# Altium PCB High_Power_Board_v2.PcbDoc (part 1 of 3)
Units mm, origin at the board's own origin, x right, y up, seen from the top; angles counter-clockwise.
Board outline 370 x 200 mm, 2 copper layers (Top Layer, Bottom Layer); 309 components, 248 nets, 1084 pads, 8 vias.
Unrouted connection lines stored in the file: 720.
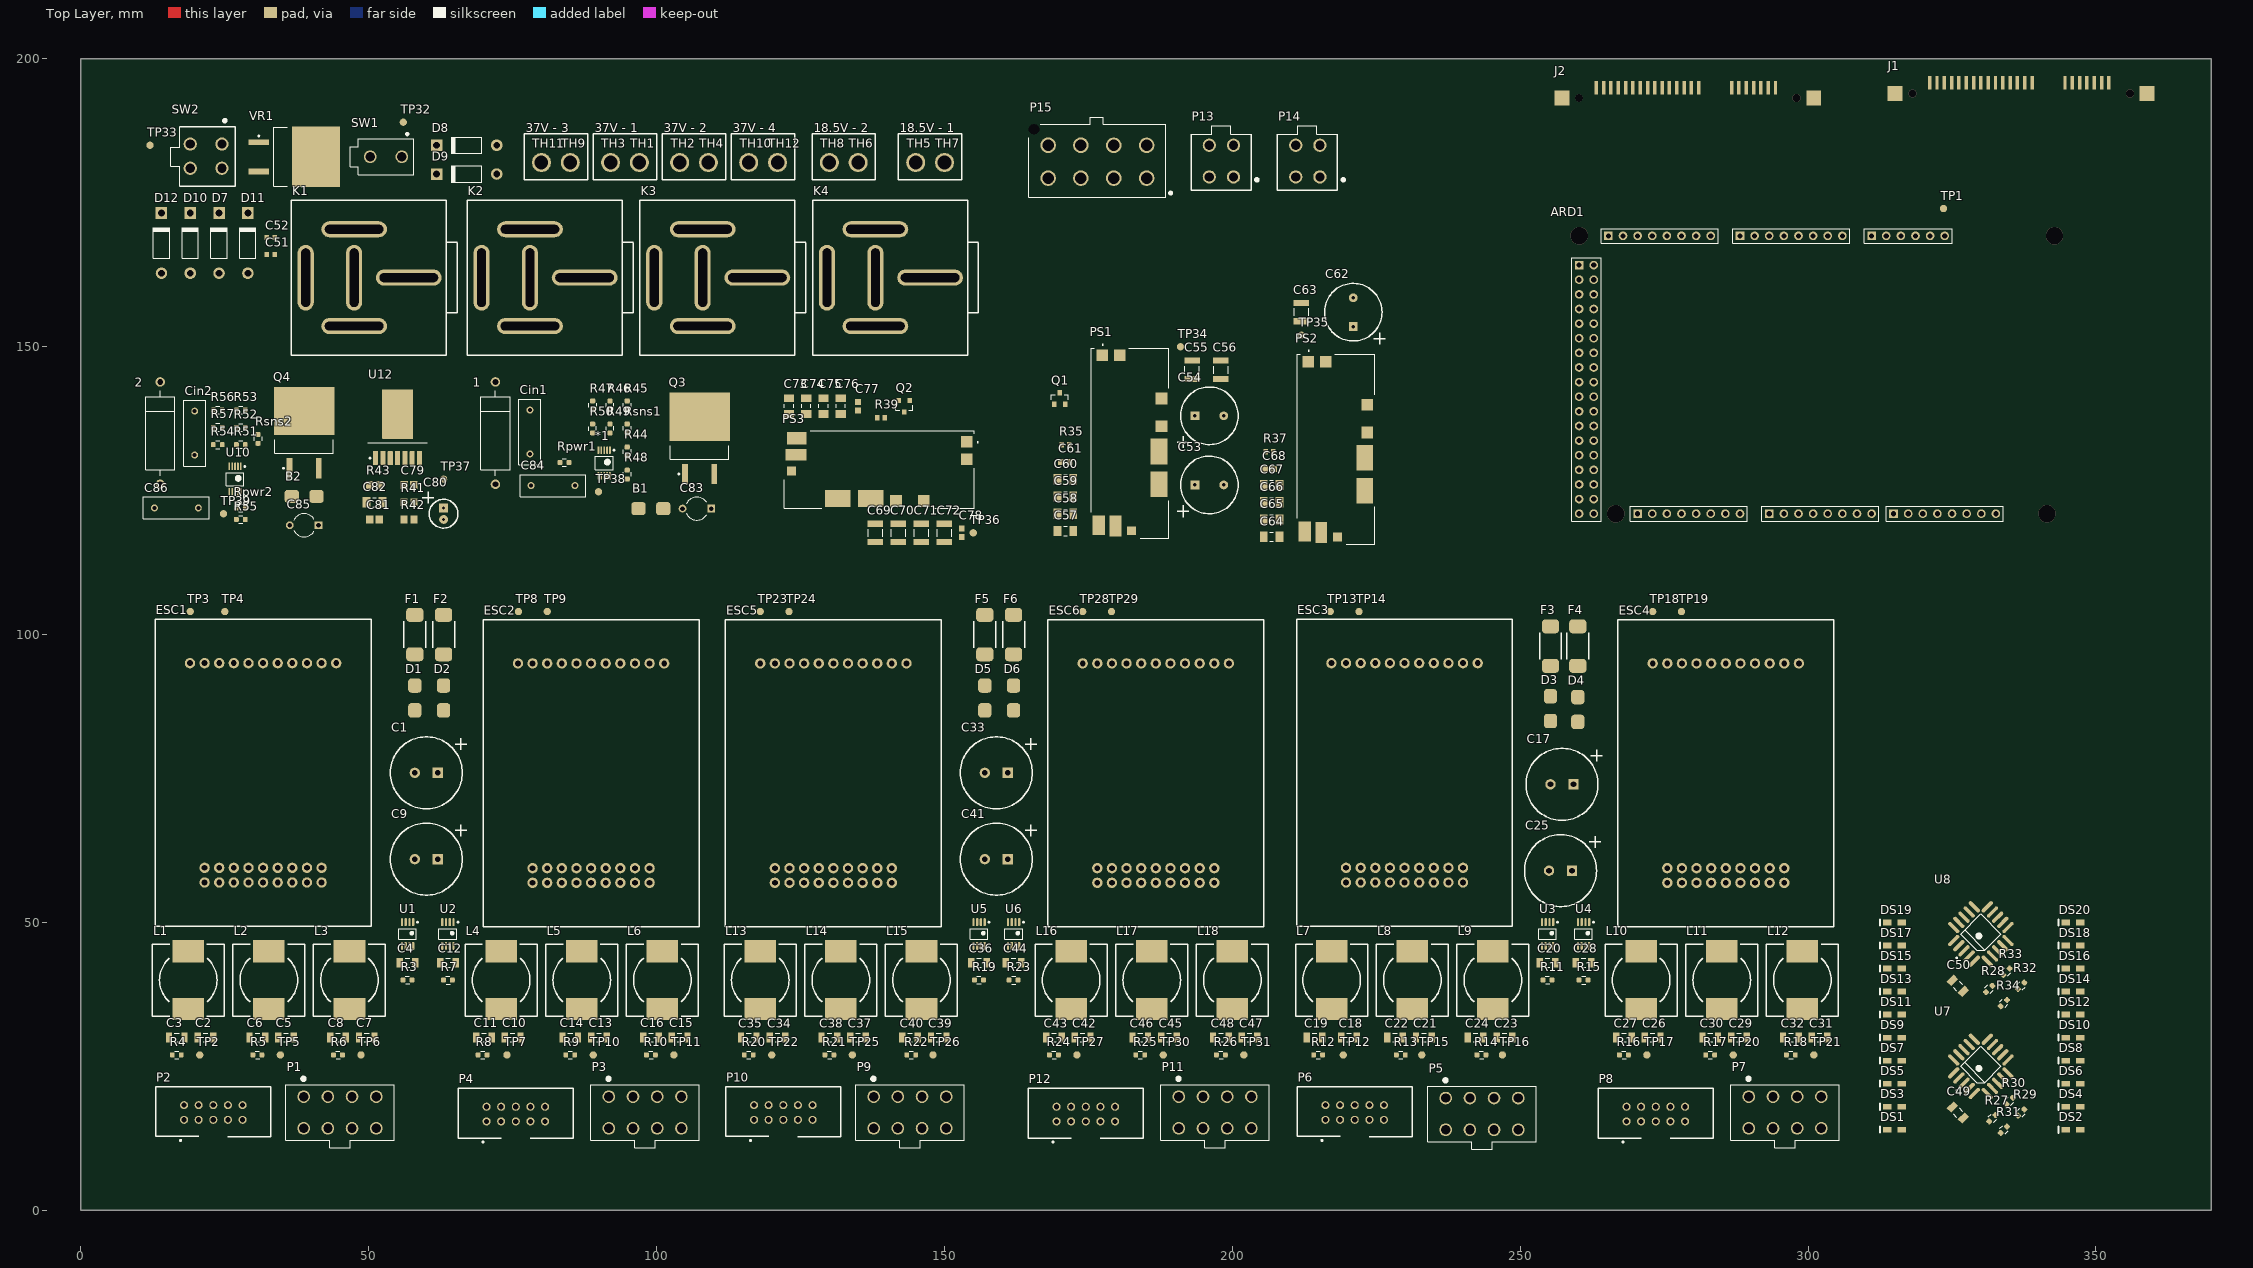
[diagram p0: Top Layer view]
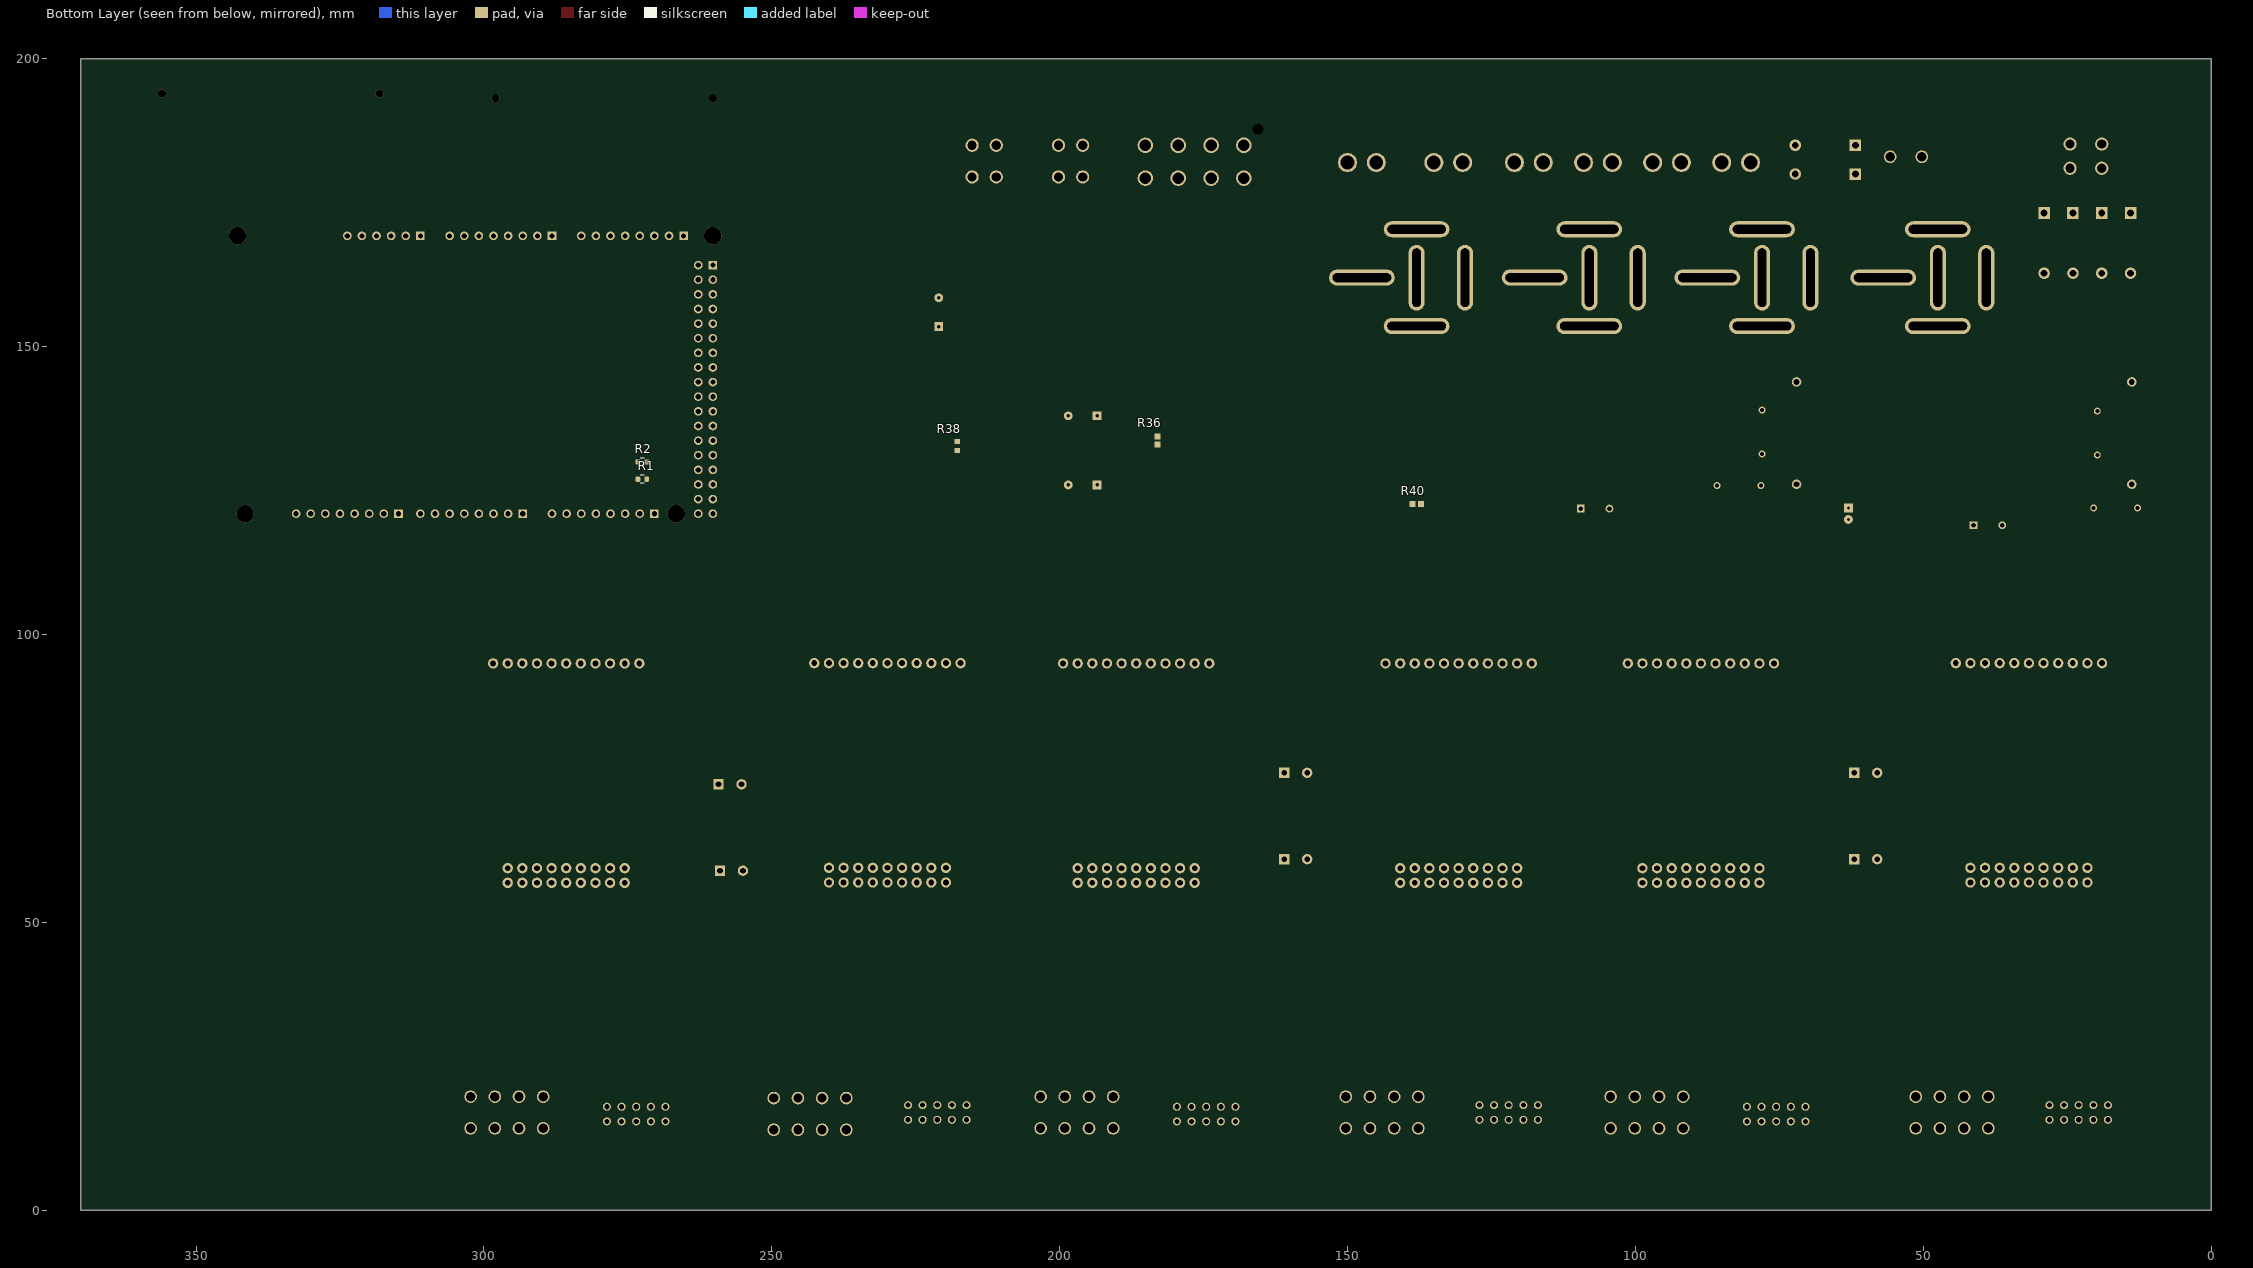
[diagram p1: Bottom Layer view, seen from below]

## Layer stack, top to bottom
Top Solder: solder mask 0.0102, Solder Resist, Dk 3.5
Top Layer: signal copper 0.0356
Dielectric 1: dielectric 0.32, FR-4, Dk 4.8
Bottom Layer: signal copper 0.0356
Bottom Solder: solder mask 0.0102, Solder Resist, Dk 3.5

## Board outline
0,0 0,200 370,200 370,0

## Design rules (kind name [scope] priority, off if disabled: settings)
Clearance [All] p1: gap=0.254 ignorepadtopadclearanceinfootprint=TRUE except(0: Arc-Hole Track-Hole SMDPad-Hole THPad-Hole Via-Hole Fill-Hole Poly-Hole Region-Hole Text-Hole)
PolygonConnect [All] p1: connectstyle=Relief reliefconductorwidth=0.254 reliefentries=4 polygonreliefangle="90 Angle" airgapwidth=0.254
RoomDefinition "SCH-2-Main Controls" [InComponentClass('SCH-2-Main Controls')] p1: confinementstyle=ConfineIn formatcopy=TRUE lockcomponents=FALSE outline 253.785,108.908 367,108.908 367,177.908 253.785,177.908
RoomDefinition "SCH-11-Out Going Connectors" [InComponentClass('SCH-11-Out Going Connectors')] p2: confinementstyle=ConfineIn formatcopy=TRUE lockcomponents=FALSE outline 164,174 370,174 370,200 164,200
RoomDefinition 3V3_board [InComponentClass('3V3_board')] p3: confinementstyle=ConfineIn formatcopy=TRUE lockcomponents=FALSE outline 202,115 202,152 165,152 165,115
RoomDefinition SCH-1-Relay_circuit [InComponentClass('SCH-1-Relay_circuit')] p4: confinementstyle=ConfineIn formatcopy=TRUE lockcomponents=FALSE outline 10,147 158,147 158,190 10,190
RoomDefinition 5V_board [InComponentClass('5V_board')] p5: confinementstyle=ConfineIn formatcopy=TRUE lockcomponents=FALSE outline 202.79,115.1 241.79,115.1 241.79,167 202.79,167
RoomDefinition "SCH-9-Battery Voltage Indicators" [InComponentClass('SCH-9-Battery Voltage Indicators')] p6: confinementstyle=ConfineIn formatcopy=TRUE lockcomponents=FALSE outline 310,10 350,10 350,58 310,58
RoomDefinition 37V_efuse [InComponentClass('37V_efuse')] p7: confinementstyle=ConfineIn formatcopy=TRUE lockcomponents=FALSE outline 9.775,116 45.775,116 45.775,145 9.775,145
RoomDefinition 18V5_efuse [InComponentClass('18V5_efuse')] p8: confinementstyle=ConfineIn formatcopy=TRUE lockcomponents=FALSE outline 68,115.89 115.896,115.89 115.896,145 68,145
RoomDefinition "SCH-10-Power Connectors" [InComponentClass('SCH-10-Power Connectors')] p9: confinementstyle=ConfineIn formatcopy=TRUE lockcomponents=TRUE outline 76,177 156,177 156,189.572 76,189.572
RoomDefinition SCH-6-ESC4 [InComponentClass('SCH-6-ESC4')] p10: confinementstyle=ConfineIn formatcopy=TRUE lockcomponents=FALSE outline 250,10 308,10 308,106 250,106
RoomDefinition SCH-5-ESC3 [InComponentClass('SCH-5-ESC3')] p11: confinementstyle=ConfineIn formatcopy=TRUE lockcomponents=FALSE outline 208,10 266,10 266,106 208,106
RoomDefinition SCH-8-ESC6 [InComponentClass('SCH-8-ESC6')] p12: confinementstyle=ConfineIn formatcopy=TRUE lockcomponents=FALSE outline 152,10 208,10 208,106 152,106
RoomDefinition SCH-7-ESC5 [InComponentClass('SCH-7-ESC5')] p13: confinementstyle=ConfineIn formatcopy=TRUE lockcomponents=FALSE outline 110,10 167,10 167,106 110,106
RoomDefinition SCH-3-ESC1 [InComponentClass('SCH-3-ESC1')] p14: confinementstyle=ConfineIn formatcopy=TRUE lockcomponents=FALSE outline 10,10.04 68,10.04 68,106 10,106 // set top left
RoomDefinition SCH-4-ESC2 [InComponentClass('SCH-4-ESC2')] p15: confinementstyle=ConfineIn formatcopy=TRUE lockcomponents=FALSE outline 53,10 110,10 110,106 53,106 // set top right
RoomDefinition 24V_board [InComponentClass('24V_board')] p16: confinementstyle=ConfineIn formatcopy=TRUE lockcomponents=FALSE outline 48,116 66,116 66,145 48,145
RoomDefinition 12V_board [InComponentClass('12V_board')] p17: confinementstyle=ConfineIn formatcopy=TRUE lockcomponents=FALSE outline 118,114 157,114 157,145 118,145
RoutingVias [All] p1: holewidth=0.711 width=1.27 viastyle="Through Hole" minholewidth=0.711 minwidth=1.27 maxholewidth=0.711 maxwidth=1.27
SolderMaskExpansion [All] p1: expansion=0.102 istentingtop=FALSE
Width [All] p1: maxlimit=0.254 minlimit=0.254 preferedwidth=0.254
30 further rules are at their usual default settings.

## Classes and differential pairs
component class "SCH-11-Out Going Connectors": J1 J2 P13 P14 P15
component class "SCH-10-Power Connectors": TH1 TH2 TH3 TH4 TH5 TH6 TH7 TH8 TH9 TH10 TH11 TH12
component class "SCH-9-Battery Voltage Indicators": C49 C50 DS1 DS2 DS3 DS4 DS5 DS6 DS7 DS8 DS9 DS10 DS11 DS12 DS13 DS14 DS15 DS16 DS17 DS18 DS19 DS20 R27 R28 R29 R30 R31 R32 R33 R34 U7 U8
component class SCH-8-ESC6: C41 C42 C43 C44 C45 C46 C47 C48 D6 ESC6 F6 L16 L17 L18 P11 P12 R23 R24 R25 R26 TP27 TP28 TP29 TP30 TP31 U6
component class SCH-7-ESC5: C33 C34 C35 C36 C37 C38 C39 C40 D5 ESC5 F5 L13 L14 L15 P9 P10 R19 R20 R21 R22 TP22 TP23 TP24 TP25 TP26 U5
component class SCH-6-ESC4: C25 C26 C27 C28 C29 C30 C31 C32 D4 ESC4 F4 L10 L11 L12 P7 P8 R15 R16 R17 R18 TP17 TP18 TP19 TP20 TP21 U4
component class SCH-5-ESC3: C17 C18 C19 C20 C21 C22 C23 C24 D3 ESC3 F3 L7 L8 L9 P5 P6 R11 R12 R13 R14 TP12 TP13 TP14 TP15 TP16 U3
component class SCH-4-ESC2: C9 C10 C11 C12 C13 C14 C15 C16 D2 ESC2 F2 L4 L5 L6 P3 P4 R7 R8 R9 R10 TP7 TP8 TP9 TP10 TP11 U2
component class SCH-3-ESC1: C1 C2 C3 C4 C5 C6 C7 C8 D1 ESC1 F1 L1 L2 L3 P1 P2 R3 R4 R5 R6 TP2 TP3 TP4 TP5 TP6 U1
component class "SCH-2-Main Controls": ARD1 R1 R2 TP1
component class SCH-1-Relay_circuit: C51 C52 D7 D8 D9 D10 D11 D12 K1 K2 K3 K4 SW1 SW2 TP32 TP33 VR1
component class 37V_efuse: 2 B2 C85 C86 Cin2 Q4 R51 R52 R53 R54 R55 R56 R57 Rpwr2 Rsns2 TP39 U10
component class 24V_board: C79 C80 C81 C82 R41 R42 R43 TP37 U12
component class 18V5_efuse: 1 *1 B1 C83 C84 Cin1 Q3 R44 R45 R46 R47 R48 R49 R50 Rpwr1 Rsns1 TP38
component class 12V_board: C69 C70 C71 C72 C73 C74 C75 C76 C77 C78 PS3 Q2 R39 R40 TP36
component class 5V_board: C62 C63 C64 C65 C66 C67 C68 PS2 R37 R38 TP35
component class 3V3_board: C53 C54 C55 C56 C57 C58 C59 C60 C61 PS1 Q1 R35 R36 TP34

## Components (designator, comment, footprint, x,y, rotation, side; value= is the part's Value field where it differs from the comment)
1 "D Zener" DIODE-0.7 72,135 r90 top
2 "D Zener" DIODE-0.7 13.775,135 r90 top
*1 "LM5069MM-2/NOPB" TSSOP50P490X110-10N 90.896,129.809 r270 top (schematic designator U14)
ARD1 "Arduino Mega" "Arduino Mega" 303.41,143.86 r180 top
B1 "TVS_DIODE" SMBJ54A-13-F 99,121.89 r0 top (schematic designator B3)
B2 "TVS_DIODE" SMBJ54A-13-F 38.775,124 r180 top
C1 "Panasonic EEU-FC1J221S" "Panasonic EEU-FC1J221S" 60,76 r0 top value=220uF
C2 "Cap Semi" C1206 21.65,30 r180 top value=100pF
C3 "Cap Semi" C1206 16.65,30 r0 top value=100pF
C4 "Cap Semi" C1206 56.74,43 r0 top value=100pF
C5 "Cap Semi" C1206 35.65,30 r180 top value=100pF
C6 "Cap Semi" C1206 30.65,30 r0 top value=100pF
C7 "Cap Semi" C1206 49.65,30 r180 top value=100pF
C8 "Cap Semi" C1206 44.65,30 r0 top value=100pF
C9 "Panasonic EEU-FC1J221S" "Panasonic EEU-FC1J221S" 60,61 r0 top value=220uF
C10 "Cap Semi" C1206 75,30 r180 top value=100pF
C11 "Cap Semi" C1206 70,30 r0 top value=100pF
C12 "Cap Semi" C1206 63.74,43 r0 top value=100pF
C13 "Cap Semi" C1206 90,30 r180 top value=100pF
C14 "Cap Semi" C1206 85,30 r0 top value=100pF
C15 "Cap Semi" C1206 104,30 r180 top value=100pF
C16 "Cap Semi" C1206 99,30 r0 top value=100pF
C17 "Panasonic EEU-FC1J221S" "Panasonic EEU-FC1J221S" 257.254,74 r0 top value=220uF
C18 "Cap Semi" C1206 220.254,30 r180 top value=100pF
C19 "Cap Semi" C1206 214.254,30 r0 top value=100pF
C20 "Cap Semi" C1206 254.746,43 r0 top value=100pF
C21 "Cap Semi" C1206 233.254,30 r180 top value=100pF
C22 "Cap Semi" C1206 228.254,30 r0 top value=100pF
C23 "Cap Semi" C1206 247.254,30 r180 top value=100pF
C24 "Cap Semi" C1206 242.254,30 r0 top value=100pF
C25 "Panasonic EEU-FC1J221S" "Panasonic EEU-FC1J221S" 257,59 r0 top value=220uF
C26 "Cap Semi" C1206 273,30 r180 top value=100pF
C27 "Cap Semi" C1206 268,30 r0 top value=100pF
C28 "Cap Semi" C1206 261,43 r0 top value=100pF
C29 "Cap Semi" C1206 288,30 r180 top value=100pF
C30 "Cap Semi" C1206 283,30 r0 top value=100pF
C31 "Cap Semi" C1206 302,30 r180 top value=100pF
C32 "Cap Semi" C1206 297,30 r0 top value=100pF
C33 "Panasonic EEU-FC1J221S" "Panasonic EEU-FC1J221S" 159,76 r0 top value=220uF
C34 "Cap Semi" C1206 121,30 r180 top value=100pF
C35 "Cap Semi" C1206 116,30 r0 top value=100pF
C36 "Cap Semi" C1206 156,43 r0 top value=100pF
C37 "Cap Semi" C1206 135,30 r180 top value=100pF
C38 "Cap Semi" C1206 130,30 r0 top value=100pF
C39 "Cap Semi" C1206 149,30 r180 top value=100pF
C40 "Cap Semi" C1206 144,30 r0 top value=100pF
C41 "Panasonic EEU-FC1J221S" "Panasonic EEU-FC1J221S" 159,61 r0 top value=220uF
C42 "Cap Semi" C1206 174,30 r180 top value=100pF
C43 "Cap Semi" C1206 169,30 r0 top value=100pF
C44 "Cap Semi" C1206 162,43 r0 top value=100pF
C45 "Cap Semi" C1206 189,30 r180 top value=100pF
C46 "Cap Semi" C1206 184,30 r0 top value=100pF
C47 "Cap Semi" C1206 203,30 r180 top value=100pF
C48 "Cap Semi" C1206 198,30 r0 top value=100pF
C49 "Cap Semi" C1206 326,17 r315 top value=100pF
C50 "Cap Semi" C1206 326,39 r315 top value=100pF
C51 "Cap" 1608[0603] 33,166 r180 top value=100nF
C52 "Cap" 1608[0603] 33,169 r180 top value=22uF
C53 "330uF" "330uF throught hole" 196,126 r180 top
C54 "330uF" "330uF throught hole" 196,138 r180 top
C55 "22uF" "22uF Capacitor" 193,146 r270 top
C56 "22uF" "22uF Capacitor" 198,146 r270 top
C57 "10uf" "10uF capacitor LPB" 171,118 r0 top
C58 "10uf" "10uF capacitor LPB" 171,121 r0 top
C59 "10uf" "10uF capacitor LPB" 171,124 r0 top
C60 "10uf" "10uF capacitor LPB" 171,127 r0 top
C61 "0.01uF" "0.01uF capacitor" 171,130 r0 top
C62 "330uF" "330uF throught hole" 221,156 r270 top
C63 "22uF" "22uF Capacitor" 212,156 r270 top
C64 "10uf" "10uF capacitor LPB" 206.822,116.986 r0 top
C65 "10uf" "10uF capacitor LPB" 206.822,119.986 r0 top
C66 "10uf" "10uF capacitor LPB" 206.822,122.986 r0 top
C67 "10uf" "10uF capacitor LPB" 206.822,125.986 r0 top
C68 "0.01uF" "0.01uF capacitor" 206.44,128.75 r0 top
C69 "22uF" "22uF Capacitor" 137.996,117.682 r90 top
C70 "22uF" "22uF Capacitor" 141.996,117.682 r90 top
C71 "22uF" "22uF Capacitor" 145.996,117.682 r90 top
C72 "22uF" "22uF Capacitor" 149.996,117.682 r90 top
C73 "10uf" "10uF capacitor LPB" 122.996,139.682 r270 top
C74 "10uf" "10uF capacitor LPB" 125.996,139.682 r270 top
C75 "10uf" "10uF capacitor LPB" 128.996,139.682 r270 top
C76 "10uf" "10uF capacitor LPB" 131.996,139.682 r270 top
C77 "0.01uF" "0.01uF capacitor" 134.996,139.682 r270 top
C78 "0.01uF" "0.01uF capacitor" 152.996,117.682 r90 top
C79 "0.022uF" "0.022uF Ceramic" 57,126 r0 top
C80 "33uF" "33uF Through hole Radical" 63,121 r90 top
C81 "4700 pF" "4700uF 0805" 51,120 r0 top
C82 "10uf" "10uF capacitor LPB" 51,123 r0 top
C83 "Cap2" CAPR5-4X5 107,121.89 r180 top value=100pF (schematic designator C74)
C84 "Cap" RAD-0.3 82,125.89 r0 top value=220nF (schematic designator C76)
C85 "Cap2" CAPR5-4X5 38.775,119 r180 top value=100pF
C86 "Cap" RAD-0.3 16.585,122 r0 top value=220nF
Cin1 "Cin" RAD-0.3 78,135.19 r90 top value=100pF
Cin2 "Cin" RAD-0.3 19.775,135 r90 top value=100pF
D1 "TVS_DIODE" SMBJ54A-13-F 58,89 r270 top
D2 "TVS_DIODE" SMBJ54A-13-F 63,89 r270 top
D3 "TVS_DIODE" SMBJ54A-13-F 255.254,87.15 r270 top
D4 "TVS_DIODE" SMBJ54A-13-F 260,87 r270 top
D5 "TVS_DIODE" SMBJ54A-13-F 157,89 r270 top
D6 "TVS_DIODE" SMBJ54A-13-F 162,89 r270 top
D7 "Diode 1N4001" DO-41 24,168 r90 top
D8 "Diode 1N4001" DO-41 67,185 r180 top
D9 "Diode 1N4001" DO-41 67,180 r180 top
D10 "Diode 1N4001" DO-41 19,168 r90 top
D11 "Diode 1N4001" DO-41 29,168 r90 top
D12 "Diode 1N4001" DO-41 14,168 r90 top
DS1 "LTST-S220KGKT" LTST-S220KGKT_V 315,14.011 r180 top
DS2 "LTST-S220KGKT" LTST-S220KGKT_V 346,14 r180 top
DS3 "LTST-S220KGKT" LTST-S220KGKT_V 315,18 r180 top
DS4 "LTST-S220KGKT" LTST-S220KGKT_V 346,18 r180 top
DS5 "LTST-S220KGKT" LTST-S220KGKT_V 315,22 r180 top
DS6 "LTST-S220KGKT" LTST-S220KGKT_V 346,22 r180 top
DS7 "LTST-S220KGKT" LTST-S220KGKT_V 315,26 r180 top
DS8 "LTST-S220KGKT" LTST-S220KGKT_V 346,26 r180 top
DS9 "LTST-S220KGKT" LTST-S220KGKT_V 315,30 r180 top
DS10 "LTST-S220KGKT" LTST-S220KGKT_V 346,30 r180 top
DS11 "LTST-S220KGKT" LTST-S220KGKT_V 315,34 r180 top
DS12 "LTST-S220KGKT" LTST-S220KGKT_V 346,34 r180 top
DS13 "LTST-S220KGKT" LTST-S220KGKT_V 315,38 r180 top
DS14 "LTST-S220KGKT" LTST-S220KGKT_V 346,38 r180 top
DS15 "LTST-S220KGKT" LTST-S220KGKT_V 315,42 r180 top
DS16 "LTST-S220KGKT" LTST-S220KGKT_V 346,42 r180 top
DS17 "LTST-S220KGKT" LTST-S220KGKT_V 315,46 r180 top
DS18 "LTST-S220KGKT" LTST-S220KGKT_V 346,46 r180 top
DS19 "LTST-S220KGKT" LTST-S220KGKT_V 315,50 r180 top
DS20 "LTST-S220KGKT" LTST-S220KGKT_V 346,50 r180 top
ESC1 "ESCON 50/8 HE" "ESCON 50/8 HE" 31.65,76 r90 top
ESC2 "ESCON 50/8 HE" "ESCON 50/8 HE" 88.62,75.95 r90 top
ESC3 "ESCON 50/8 HE" "ESCON 50/8 HE" 229.904,76 r90 top
ESC4 "ESCON 50/8 HE" "ESCON 50/8 HE" 285.7,75.95 r90 top
ESC5 "ESCON 50/8 HE" "ESCON 50/8 HE" 130.7,75.95 r90 top
ESC6 "ESCON 50/8 HE" "ESCON 50/8 HE" 186.7,75.95 r90 top
F1 "Fuse 2" 0157010.DR 58,100 r90 top
F2 "Fuse 2" 0157010.DR 63,100 r90 top
F3 "Fuse 2" 0157010.DR 255.254,98 r90 top
F4 "Fuse 2" 0157010.DR 260,98 r90 top
F5 "Fuse 2" 0157010.DR 157,100 r90 top
F6 "Fuse 2" 0157010.DR 162,100 r270 top
J1 "SATA 1" "SATA Female" 337,194 r0 top
J2 "SATA 2" "SATA Female" 279.1,193.175 r0 top
K1 "Relay" "Relay RC-700112-NN" 50,162 r90 top
K2 "Relay" "Relay RC-700112-NN" 80.54,162 r90 top
K3 "Relay" "Relay RC-700112-NN" 110.54,162 r90 top
K4 "Relay" "Relay RC-700112-NN" 140.54,162 r90 top
L1 "DR127-4R7-R" DR127-4R7-R 18.65,40 r270 top value=4.7uH
L2 "DR127-4R7-R" DR127-4R7-R 32.65,40 r270 top value=4.7uH
L3 "DR127-4R7-R" DR127-4R7-R 46.65,40 r270 top value=4.7uH
L4 "DR127-4R7-R" DR127-4R7-R 73,40 r270 top value=4.7uH
L5 "DR127-4R7-R" DR127-4R7-R 87,40 r270 top value=4.7uH
L6 "DR127-4R7-R" DR127-4R7-R 101,40 r270 top value=4.7uH
L7 "DR127-4R7-R" DR127-4R7-R 217.254,40 r270 top value=4.7uH
L8 "DR127-4R7-R" DR127-4R7-R 231.254,40 r270 top value=4.7uH
L9 "DR127-4R7-R" DR127-4R7-R 245.254,40 r90 top value=4.7uH
L10 "DR127-4R7-R" DR127-4R7-R 271,40 r270 top value=4.7uH
L11 "DR127-4R7-R" DR127-4R7-R 285,40 r270 top value=4.7uH
L12 "DR127-4R7-R" DR127-4R7-R 299,40 r90 top value=4.7uH
L13 "DR127-4R7-R" DR127-4R7-R 118,40 r270 top value=4.7uH
L14 "DR127-4R7-R" DR127-4R7-R 132,40 r270 top value=4.7uH
L15 "DR127-4R7-R" DR127-4R7-R 146,40 r270 top value=4.7uH
L16 "DR127-4R7-R" DR127-4R7-R 172,40 r270 top value=4.7uH
L17 "DR127-4R7-R" DR127-4R7-R 186,40 r270 top value=4.7uH
L18 "DR127-4R7-R" DR127-4R7-R 200,40 r270 top value=4.7uH
P1 "0039281083" "Molex Mini-Fit Jr 0039281083" 45,17 r0 top
P2 "Header_10_Pos_Ribbon Male" 3M_2510-6002UB 23,17 r0 top
P3 "0039281083" "Molex Mini-Fit Jr 0039281083" 98,17 r0 top
P4 "Header_10_Pos_Ribbon Male" 3M_2510-6002UB 75.54,16.73 r0 top
P5 "0039281083" "Molex Mini-Fit Jr 0039281083" 243.354,16.75 r0 top
P6 "Header_10_Pos_Ribbon Male" 3M_2510-6002UB 221.254,17 r0 top
P7 "0039281083" "Molex Mini-Fit Jr 0039281083" 296,17 r0 top
P8 "Header_10_Pos_Ribbon Male" 3M_2510-6002UB 273.54,16.73 r0 top
P9 "0039281083" "Molex Mini-Fit Jr 0039281083" 144,17 r0 top
P10 "Header_10_Pos_Ribbon Male" 3M_2510-6002UB 122,17 r0 top
P11 "0039281083" "Molex Mini-Fit Jr 0039281083" 197,17 r0 top
P12 "Header_10_Pos_Ribbon Male" 3M_2510-6002UB 174.54,16.73 r0 top
P13 "Mini-Fit Jr 4 Pos" "MOLEX 0039281043" 200.2,179.5 r180 top
P14 "Mini-Fit Jr 4 Pos" "MOLEX 0039281043" 215.2,179.5 r180 top
P15 "Mini-Fit Jr 8 Pos RA" "MOLEX 172065-0208" 175.31,183.536 r0 top
PS1 "APXW012A0X3-SRZ" APXW012A0X3SRZ 182.227,133.62 r270 top (schematic designator U9)
PS2 "APXW012A0X3-SRZ" APXW012A0X3SRZ 217.98,132.53 r270 top (schematic designator U10)
PS3 "APXW012A0X3-SRZ" APXW012A0X3SRZ 138.996,128.682 r180 top
Q1 "2N7002-7-F" FP-SOT23-MFG 170,141 r90 top
Q2 "2N7002-7-F" FP-SOT23-MFG 142.996,139.682 r270 top
Q3 "PSMN4R8-100BSEJ" DPAK254P1420X457-3N 107.46,133.99 r90 top (schematic designator Q6)
Q4 "PSMN4R8-100BSEJ" DPAK254P1420X457-3N 38.775,135 r90 top
R1 "Res1" RESC1608X06N_0603 272.49,127 r0 bottom value=10k
R2 "Res1" RESC1608X06N_0603 272.49,130 r0 bottom value=10k
R3 "Res1" RESC1608X06N_0603 56.74,40 r0 top value=1K
R4 "Res1" RESC1608X06N_0603 16.65,27 r180 top value=1K
R5 "Res1" RESC1608X06N_0603 30.65,27 r180 top value=1K
R6 "Res1" RESC1608X06N_0603 44.65,27 r180 top value=1K
R7 "Res1" RESC1608X06N_0603 63.74,40 r180 top value=1K
R8 "Res1" RESC1608X06N_0603 69.775,27 r180 top value=1K
R9 "Res1" RESC1608X06N_0603 85,27 r180 top value=1K
R10 "Res1" RESC1608X06N_0603 99,27 r180 top value=1K
R11 "Res1" RESC1608X06N_0603 254.746,40 r0 top value=1K
R12 "Res1" RESC1608X06N_0603 214.904,27 r180 top value=1K
R13 "Res1" RESC1608X06N_0603 229.254,27 r180 top value=1K
R14 "Res1" RESC1608X06N_0603 243.254,27 r180 top value=1K
R15 "Res1" RESC1608X06N_0603 261,40 r180 top value=1K
R16 "Res1" RESC1608X06N_0603 268,27 r180 top value=1K
R17 "Res1" RESC1608X06N_0603 283,27 r180 top value=1K
R18 "Res1" RESC1608X06N_0603 297,27 r180 top value=1K
R19 "Res1" RESC1608X06N_0603 156,40 r0 top value=1K
R20 "Res1" RESC1608X06N_0603 116,27 r180 top value=1K
R21 "Res1" RESC1608X06N_0603 130,27 r180 top value=1K
R22 "Res1" RESC1608X06N_0603 144.225,27 r180 top value=1K
R23 "Res1" RESC1608X06N_0603 162,40 r180 top value=1K
R24 "Res1" RESC1608X06N_0603 169,27 r180 top value=1K
R25 "Res1" RESC1608X06N_0603 184,27 r180 top value=1K
R26 "Res1" RESC1608X06N_0603 198,27 r180 top value=1K
R27 "Res1" RESC1608X06N_0603 332,16 r225 top value=1K
R28 "Res1" RESC1608X06N_0603 331.452,38.452 r45 top value=1K
R29 "Res1" RESC1608X06N_0603 337,17 r45 top value=1K
R30 "Res1" RESC1608X06N_0603 335,19 r45 top value=1K
R31 "Res1" RESC1608X06N_0603 334,14 r225 top value=1K
R32 "Res1" RESC1608X06N_0603 337,39 r45 top value=1K
R33 "Res1" RESC1608X06N_0603 334.452,41.452 r45 top value=1K
R34 "Res1" RESC1608X06N_0603 334,36 r45 top value=1K
R35 "CRCW06030000Z0EA" RESC1609X50X30NL8T20 171,133 r0 top
R36 "26.7KR" "26.7KR Resistor" 183,133.725 r90 bottom (schematic designator R35)
R37 "CRCW06030000Z0EA" RESC1609X50X30NL8T20 206.44,131.75 r0 top
R38 "16.2 KOhm" "16.2 KOhm Resistor" 217.79,132.75 r90 bottom (schematic designator R36)
R39 "CRCW06030000Z0EA" RESC1609X50X30NL8T20 138.996,137.682 r180 top
R40 "6.19 KOhm" "6.19KOhm Resistor" 137.996,122.682 r0 bottom
R41 "34KOhm" "34 KOhm Resistor ERA-6A" 57,123 r0 top
R42 "1.18 KOhm" "34 KOhm Resistor ERA-6A" 57,120 r180 top
R43 "499 KOhm" "499KOhm RG2012" 51,126 r0 top
R44 "RCL2" RESC1608X06N_0603 94.896,131.809 r90 top value=1K (schematic designator R48)
R45 "RCL1" RESC1608X06N_0603 94.896,139.809 r270 top value=1K (schematic designator R49)
R46 "R1" RESC1608X06N_0603 91.896,139.809 r270 top value=1K (schematic designator R50)
R47 "R3" RESC1608X06N_0603 88.896,139.809 r270 top value=1K (schematic designator R51)
R48 "R" RESC1608X06N_0603 94.896,127.809 r270 top value=1K (schematic designator R53)
R49 "R2" RESC1608X06N_0603 91.896,135.809 r90 top value=1K (schematic designator R54)
R50 "R4" RESC1608X06N_0603 88.896,135.809 r90 top value=1K (schematic designator R55)
R51 "RCL2" RESC1608X06N_0603 27.775,133 r0 top value=1K
R52 "RCL1" RESC1608X06N_0603 27.775,136 r180 top value=1K
R53 "R1" RESC1608X06N_0603 27.775,139 r0 top value=1K
R54 "R3" RESC1608X06N_0603 23.775,133 r180 top value=1K
R55 "R" RESC1608X06N_0603 27.775,120 r0 top value=1K
R56 "R2" RESC1608X06N_0603 23.775,139 r0 top value=1K
R57 "R4" RESC1608X06N_0603 23.775,136 r0 top value=1K
Rpwr1 "Rpwr" RESC1608X06N_0603 84,129.89 r0 top value=1K (schematic designator R56)
Rpwr2 "Rpwr" RESC1608X06N_0603 27.775,122 r0 top value=1K
Rsns1 "Rsns" RESC1608X06N_0603 94.896,135.809 r270 top value=1K (schematic designator R47)
Rsns2 "Rsns" RESC1608X06N_0603 30.775,134 r270 top value=1K
SW1 "Key_Switch" MOLEX_0039293026 53,183 r180 top
SW2 "NO-NC ESD with light" "MOLEX 0039281043" 24.5,185.2 r270 top
TH1 "12AWG_TH" 12AWG_Wire_TH 97,182 r270 top
TH2 "12AWG_TH" 12AWG_Wire_TH 104,182 r90 top
TH3 "12AWG_TH" 12AWG_Wire_TH 92,182 r270 top
TH4 "12AWG_TH" 12AWG_Wire_TH 109,182 r90 top
TH5 "12AWG_TH" 12AWG_Wire_TH 145,182 r0 top
TH6 "12AWG_TH" 12AWG_Wire_TH 135,182 r0 top
TH7 "12AWG_TH" 12AWG_Wire_TH 150,182 r0 top
TH8 "12AWG_TH" 12AWG_Wire_TH 130,182 r0 top
TH9 "12AWG_TH" 12AWG_Wire_TH 85,182 r270 top
TH10 "12AWG_TH" 12AWG_Wire_TH 116,182 r90 top
TH11 "12AWG_TH" 12AWG_Wire_TH 80,182 r270 top
TH12 "12AWG_TH" 12AWG_Wire_TH 121,182 r90 top
TP1 "TestPt" 50_MIL_PAD 323.51,174 r90 top
TP2 "TestPt" 50_MIL_PAD 20.65,27 r90 top
TP3 "TestPt" 50_MIL_PAD 19,104 r270 top
TP4 "TestPt" 50_MIL_PAD 25,104 r270 top
TP5 "TestPt" 50_MIL_PAD 34.65,27 r90 top
TP6 "TestPt" 50_MIL_PAD 48.65,27 r90 top
TP7 "TestPt" 50_MIL_PAD 74,27 r90 top
TP8 "TestPt" 50_MIL_PAD 76,104 r270 top
TP9 "TestPt" 50_MIL_PAD 81,104 r270 top
TP10 "TestPt" 50_MIL_PAD 89,27 r90 top
TP11 "TestPt" 50_MIL_PAD 103,27 r90 top
TP12 "TestPt" 50_MIL_PAD 219.254,27 r90 top
TP13 "TestPt" 50_MIL_PAD 217,104 r270 top
TP14 "TestPt" 50_MIL_PAD 222,104 r270 top
TP15 "TestPt" 50_MIL_PAD 232.904,27 r90 top
TP16 "TestPt" 50_MIL_PAD 246.904,27 r90 top
TP17 "TestPt" 50_MIL_PAD 272,27 r90 top
TP18 "TestPt" 50_MIL_PAD 273,104 r90 top
TP19 "TestPt" 50_MIL_PAD 278,104 r90 top
TP20 "TestPt" 50_MIL_PAD 287,27 r90 top
TP21 "TestPt" 50_MIL_PAD 301,27 r90 top
TP22 "TestPt" 50_MIL_PAD 120,27 r90 top
TP23 "TestPt" 50_MIL_PAD 118,104 r270 top
TP24 "TestPt" 50_MIL_PAD 123,104 r270 top
TP25 "TestPt" 50_MIL_PAD 134,27 r90 top
TP26 "TestPt" 50_MIL_PAD 148,27 r90 top
TP27 "TestPt" 50_MIL_PAD 173,27 r90 top
TP28 "TestPt" 50_MIL_PAD 174,104 r90 top
TP29 "TestPt" 50_MIL_PAD 179,104 r90 top
TP30 "TestPt" 50_MIL_PAD 188,27 r90 top
TP31 "TestPt" 50_MIL_PAD 202,27 r90 top
TP32 "TestPt" 50_MIL_PAD 56,189 r90 top
TP33 "TestPt" 50_MIL_PAD 12,185 r90 top
TP34 "TestPt" 50_MIL_PAD 191,150 r180 top
TP35 "TestPt" 50_MIL_PAD 212,152 r180 top
TP36 "TestPt" 50_MIL_PAD 154.996,117.682 r90 top
TP37 "TestPt" 50_MIL_PAD 63,127 r90 top
TP38 "TestPt" 50_MIL_PAD 89.896,124.809 r0 top (schematic designator TP37)
TP39 "TestPt" 50_MIL_PAD 24.775,121 r90 top
U1 "DAC121C085" MUA08A_L 56.74,48 r270 top
U2 "DAC121C085" MUA08A_L 63.74,48 r270 top
U3 "DAC121C085" MUA08A_L 254.746,48 r270 top
U4 "DAC121C085" MUA08A_L 261,48 r270 top
U5 "DAC121C085" MUA08A_L 156,48 r270 top
U6 "DAC121C085" MUA08A_L 162,48 r270 top
U7 "LM3914VX/NOPB" PLCC127P990X990X457-20N 330,25 r135 top
U8 "LM3914VX/NOPB" PLCC127P990X990X457-20N 330,48 r135 top
U10 "LM5069MM-2/NOPB" TSSOP50P490X110-10N 26.775,127 r270 top (schematic designator U12)
U12 "LMZ14203HTZX/NOPB" NDW0007A_V 55,136 r90 top
VR1 "Volt Reg" DPAK254P1420X457-3N 37,183 r0 top

## Footprints (in the part's own frame and the unit in brackets; to place one, negate y for a bottom-side part, rotate by r counter-clockwise, add the part's x,y. Pads: shape width x height; smd on the part's side, far side on the other; paste and mask are expansions set on the pad)
"0.01uF capacitor" [mm] "Chip Capacitor, 2-Leads, Body 1,60x0,80mm, IPC Medium Density"
  rect 1.05x1 smd: 1(-0.75,0) 2(0.75,0)
  body extent -0.88,-0.48 0.87,0.47, height 0.87
"0.022uF Ceramic" [mm] "Chip Capacitor, 2-Leads, Body 2,00x1,25mm, IPC Medium Density"
  rect 1.3x1.45 smd: 1(-0.8,0) 2(0.8,0)
  body extent -1.1,-0.72 1.1,0.72, height 0.88
3M_2510-6002UB [mm] "Connector Header Through Hole 10 position 0.100\" (2.54mm)"
  round 1.4 hole 0.889: 1(-5.08,-1.27) 2(-5.08,1.27) 3(-2.54,-1.27) 4(-2.54,1.27) 5(0,-1.27) 6(0,1.27) 7(2.54,-1.27) 8(2.54,1.27) 9(5.08,-1.27) 10(5.08,1.27)
  silkscreen extent -10.01,-4.89 9.98,4.47, body extent -10.01,-4.17 10.01,4.47, height 9.4
"6.19KOhm Resistor" [mm] "Chip Resistor, 2-Leads, Body 1,60x0,80mm, IPC Medium Density"
  rect 1.05x1 smd: 1(-0.725,0) 2(0.725,0)
  body extent -0.9,-0.5 0.9,0.5, height 0.55
"10uF capacitor LPB" [mm] "Chip Capacitor, 2-Leads, Body 3,20x1,60mm, IPC Medium Density"
  rect 1.35x1.8 smd: 1(-1.375,0) 2(1.375,0)
  silkscreen extent -0.3,-0.8 0.3,0.8, body extent -1.7,-0.9 1.7,0.9, height 1.8
12AWG_Wire_TH [mm] "21.25mm Dia: 28mm Pad"
  round 3.3 hole 2.35 mask+0.2: 1(0,0)
"16.2 KOhm Resistor" [mm] "Chip Resistor, 2-Leads, Body 1,60x0,80mm, IPC Medium Density"
  rect 0.85x0.9 smd: 1(-0.775,0) 2(0.775,0)
  body extent -0.85,-0.45 0.85,0.45, height 0.55
"22uF Capacitor" [mm] "Chip Capacitor, 2-Leads, Body 3,20x2,50mm, IPC Medium Density"
  rect 1.05x2.7 smd: 1(-1.575,0) 2(1.575,0)
  silkscreen extent -0.65,-1.25 0.65,1.25, body extent -1.75,-1.35 1.75,1.35, height 2.7
"26.7KR Resistor" [mm] "Chip Resistor, 2-Leads, Body 1,60x0,80mm, IPC Medium Density"
  rect 1.05x1 smd: 1(-0.725,0) 2(0.725,0)
  body extent -0.9,-0.5 0.9,0.5, height 0.55
"33uF Through hole Radical" [mm]
  rect 1.524x1.524 hole 0.5: 1(1,0)
  round 1.524 hole 0.5: 2(-1,0)
  silkscreen extent -2.5,-2.5 3.79,3.67
"34 KOhm Resistor ERA-6A" [mm] "Chip Resistor, 2-Leads, Body 2,00x1,25mm, IPC Medium Density"
  rect 1.2x1.35 smd: 1(-0.85,0) 2(0.85,0)
  body extent -1.1,-0.67 1.1,0.67, height 0.6
50_MIL_PAD [mm]
  round 1.27 smd: 1(0,0)
"330uF throught hole" [mm]
  rect 1.524x1.524 hole 0.6: 1(2.5,0)
  round 1.524 hole 0.6: 2(-2.5,0)
  silkscreen extent -5,-5 5.57,5.57
"499KOhm RG2012" [mm] "Chip Resistor, 2-Leads, Body 2,00x1,25mm, IPC Medium Density"
  rect 1.15x1.45 smd: 1(-0.875,0) 2(0.875,0)
  body extent -1.1,-0.72 1.1,0.72, height 0.5
1608[0603] [mm] "Chip Capacitor, Body 1.6x0.8mm, IPC High Density"
  rect 0.8x0.9 smd: 1(-0.7,0) 2(0.7,0)
  body extent -0.87,-0.48 0.87,0.48, height 1.3
"4700uF 0805" [mm] "Chip Capacitor, 2-Leads, Body 2,00x1,25mm, IPC Medium Density"
  rect 1.3x1.45 smd: 1(-0.8,0) 2(0.8,0)
  body extent -1.1,-0.72 1.1,0.72, height 0.88
0157010.DR [mm]
  rrect50% 2.4x3 smd: 1(3.43,0) 2(-3.43,0)
  silkscreen extent -2.29,-1.91 2.29,1.91, body extent -3.29,-1.84 3.29,1.84, height 3.9
APXW012A0X3SRZ [mm]
  rect 2.03x2.03 smd: 1(-14.89,-4.82) 7(-2.57,5.46) 8(-7.4,5.46) 9(-14.89,-1.78)
  rect 3.43x2.16 smd: 2(14.64,-5.4)
  rect 3.68x2.03 smd: 3(14.78,-2.54)
  rect 1.52x1.52 smd: 4(15.59,0.26)
  rect 4.45x2.92 smd: 5(7.53,5.02) 6(1.81,5.02)
  silkscreen extent -16.86,-6.73 16.86,6.73, body extent -16.16,-6.73 16.86,6.73, height 10.1
"Arduino Mega" [mm] "Arduino Mega 2560"
  rect 1.5x1.5 hole 0.9: 0(10.16,22.86) 8(-11.43,22.86) 21(33.02,22.86) 59(-7.62,-25.4) 67(15.24,-25.4) 75(38.1,-25.4) 79(43.18,-20.32)
  round 1.5 hole 0.9: 1(7.62,22.86) 2(5.08,22.86) 3(2.54,22.86) 4(0,22.86) 5(-2.54,22.86) 6(-5.08,22.86) 7(-7.62,22.86) 9(-13.97,22.86) 10(-16.51,22.86) 11(-19.05,22.86) 12(-21.59,22.86) 13(-24.13,22.86) 14(15.24,22.86) 15(17.78,22.86) 16(20.32,22.86) 17(22.86,22.86) 18(25.4,22.86) 19(27.94,22.86) 20(30.48,22.86) 22(40.64,20.32) 23(43.18,20.32) 24(40.64,17.78) 25(43.18,17.78) 26(40.64,15.24) 27(43.18,15.24) 28(40.64,12.7) 29(43.18,12.7) 30(40.64,10.16) 31(43.18,10.16) 32(40.64,7.62) 33(43.18,7.62) 34(40.64,5.08) 35(43.18,5.08) 36(40.64,2.54) 37(43.18,2.54) 38(40.64,0) 39(43.18,0) 40(40.64,-2.54) 41(43.18,-2.54) 42(40.64,-5.08) 43(43.18,-5.08) 44(40.64,-7.62) 45(43.18,-7.62) 46(40.64,-10.16) 47(43.18,-10.16) 48(40.64,-12.7) 49(43.18,-12.7) 50(40.64,-15.24) 51(43.18,-15.24) 52(40.64,-17.78) 53(43.18,-17.78) 54(-20.32,-25.4) 55(-17.78,-25.4) 56(-15.24,-25.4) 57(-12.7,-25.4) 58(-10.16,-25.4) 60(-2.54,-25.4) 61(0,-25.4) 62(2.54,-25.4) 63(5.08,-25.4) 64(7.62,-25.4) 65(10.16,-25.4) 66(12.7,-25.4) 68(20.32,-25.4) 69(22.86,-25.4) 70(25.4,-25.4) 71(27.94,-25.4) 72(30.48,-25.4) 73(33.02,-25.4) 74(35.56,-25.4) 76(-26.67,22.86) 77(-29.21,22.86) 78(40.64,-20.32) 80(43.18,22.86) 81(40.64,22.86)
  silkscreen extent -30.48,-26.67 44.45,24.13
C1206 [mm] "Chip Capacitor, Body 3.2x1.6mm, IPC High Density"
  rect 1.1x1.7 smd: 1(-1.35,0) 2(1.35,0)
  silkscreen extent -0.4,-0.75 0.4,0.75, body extent -1.7,-0.9 1.7,0.9, height 1.3
CAPR5-4X5 [mm] "Capacitor; 2 Leads"
  rect 1.35x1.35 hole 0.8: 1(-2.5,0)
  round 1.35 hole 0.8: 2(2.5,0)
  silkscreen extent -1.69,-2 1.82,2
DIODE-0.7 [mm] "Diode, Thru-Hole; 2 Leads; 0.7 in Pin Spacing"
  round 1.65 hole 1: 1(-8.89,0) 2(8.89,0)
  silkscreen extent -7.37,-2.54 7.37,2.54
DO-41 [mm] "Diode, Axial; Body 5.2 x 2.7 mm (LxDia. max), Lead Dia. 0.86 mm (max)"
  round 2 hole 1.2: 1(-5.23,0)
  rect 2x2 hole 1.2: 2(5.23,0)
  silkscreen extent -2.65,-1.4 2.75,1.4
DPAK254P1420X457-3N [mm] "D2-PAK, 3-Pads, Body 7.77x8.48mm (max), IPC Medium Density"
  rect 3.504x1 smd: 1(-6.1,2.54) 3(-6.1,-2.54)
  rect 8.38x10.49 smd: 2(3.85,0)
  silkscreen extent -6.22,-5.1 -1.14,5.1, body extent -6.71,-5.13 7.48,5.13, height 4.83
DR127-4R7-R [mm] "Fixed Inductors 4.7uH 16.5A 0.0092ohms"
  rect 3.85x5.5 smd: 1(-5,0) 2(5,0)
  silkscreen extent -6.25,-6.25 6.25,6.25
"ESCON 50/8 HE" [mm]
  round 1.8 hole 1: 1(-19.05,10.16) 2(-16.51,10.16) 3(-19.05,7.62) 4(-16.51,7.62) 5(-19.05,5.08) 6(-16.51,5.08) 7(-19.05,2.54) 8(-16.51,2.54) 9(-19.05,0) 10(-16.51,0) 11(-19.05,-2.54) 12(-16.51,-2.54) 13(-19.05,-5.08) 14(-16.51,-5.08) 15(-19.05,-7.62) 16(-16.51,-7.62) 17(-19.05,-10.16) 18(-16.51,-10.16) 19(19.05,-12.7) 20(19.05,-10.16) 21(19.05,-7.62) 22(19.05,-5.08) 23(19.05,-2.54) 24(19.05,0) 25(19.05,2.54) 26(19.05,5.08) 27(19.05,7.62) 28(19.05,10.16) 29(19.05,12.7)
  silkscreen extent -26.65,-18.75 26.65,18.75
FP-SOT23-MFG [mm]
  rect 0.9x0.8 smd paste+0 mask+0: 1(-1,0.95) 2(-1,-0.95) 3(1,0)
  silkscreen extent -0.18,-1.5 0.7,1.5, body extent -1.55,-1.6 1.55,1.6, height 0.25
LTST-S220KGKT_V [mm] "SMD, 2-Leads, Body 2.15x0.6mm"
  rect 1.5x1 smd: 1(-1.25,0) 2(1.25,0)
  silkscreen extent 2.5,-0.5 2.5,0.5, body extent -1.05,-0.3 1.05,0.3, height 1.1
"MOLEX 172065-0208" [mm] "Connector Header Through Hole 8 position 0.224\" (5.70mm)"
  round 2.7 hole 2: 1(9.79,-4.236) 2(4.09,-4.236) 3(-1.61,-4.236) 4(-7.31,-4.236) 5(9.79,1.439) 6(4.09,1.439) 7(-1.61,1.464) 8(-7.31,1.464)
  round 0 hole 1.9: 6(-9.79,4.236)
  silkscreen extent -10.67,-7.56 14.1,6.35, body extent -10.5,-7.54 12.96,6.49, height 15.61
"MOLEX 0039281043" [mm] "Connector Header Through Hole 4 position 0.165\" (4.20mm)"
  round 2.3 hole 1.6: 1(0,0) 2(4.2,0) 3(0,-5.5) 4(4.2,-5.5)
  silkscreen extent -4.24,-8.89 7.37,2.29, body extent -3.07,-8.82 7.33,2.18, height 12.8
"Molex Mini-Fit Jr 0039281083" [mm]
  round 2.2 hole 1.6: 1(-6.3,2.75) 2(-2.1,2.75) 3(2.1,2.75) 4(6.3,2.75) 5(-6.3,-2.75) 6(-2.1,-2.75) 7(2.1,-2.75) 8(6.3,-2.75)
  silkscreen extent -9.4,-6.1 9.4,6.1, body extent -9.4,-6.2 9.4,4.8, height 12.8
MOLEX_0039293026 [mm]
  round 2.2 hole 1.6: 1(-2.75,0) 2(2.75,0)
  silkscreen extent -4.8,-4.06 6.22,3.1, body extent -4.8,-3.1 6.2,3.1, height 12.8
MUA08A_L [mm] "TSOP, 8-Leads, Body 3x3mm, Pitch 0.65mm, IPC High Density"
  oval 1.4x0.406 smd: 1(-2.05,0.975) 2(-2.05,0.325) 3(-2.05,-0.325) 4(-2.05,-0.975) 5(2.05,-0.975) 6(2.05,-0.325) 7(2.05,0.325) 8(2.05,0.975)
  silkscreen extent -2.17,-1.55 0.95,1.88, body extent -1.55,-1.55 1.55,1.55, height 1.09
NDW0007A_V [mm] "D2-PAK, 8-Leads, Body 9.9x10.2mm, Pitch 1.27mm, Lead Span 13.8mm, TI Recommended"
  rrect11% 2.41x0.89 smd: 1(-5.35,3.81) 2(-5.35,2.54) 3(-5.35,1.27) 4(-5.35,0) 5(-5.35,-1.27) 6(-5.35,-2.54) 7(-5.35,-3.81)
  rrect2% 8.54x5.35 smd: 8(2.28,0)
  silkscreen extent -5.47,-5.15 -2.7,5.15, body extent -2.55,-5.2 7.55,5.2, height 4.67
"Panasonic EEU-FC1J221S" [mm] "Aluminum Electrolytic Capacitors - Radial Leaded 220uF 63V"
  rect 1.8x1.8 hole 1: 1(2,0)
  round 1.8 hole 1: 2(-2,0)
  silkscreen extent -6.25,-6.25 7,6.25
PLCC127P990X990X457-20N [mm] "Leaded Chip Carrier, 20-Leads, Body 9.91x9.91mm, Pitch 1.270mm, IPC Medium Density"
  oval 0.65x2.5 smd: 1(0,4.125) 2(-1.27,4.125) 3(-2.54,4.125) 9(-2.54,-4.125) 10(-1.27,-4.125) 11(0,-4.125) 12(1.27,-4.125) 13(2.54,-4.125) 19(2.54,4.125) 20(1.27,4.125)
  oval 2.5x0.65 smd: 4(-4.125,2.54) 5(-4.125,1.27) 6(-4.125,0) 7(-4.125,-1.27) 8(-4.125,-2.54) 14(4.125,-2.54) 15(4.125,-1.27) 16(4.125,0) 17(4.125,1.27) 18(4.125,2.54)
  silkscreen extent -2.48,-2.47 2.47,6.05, body extent -5.15,-5.15 5.15,5.15, height 4.57
RAD-0.3 [mm] "Radial Cap, Thru-Hole; 2 Leads; 0.3 in Pin Spacing"
  round 1.2 hole 0.7: 1(-3.81,0) 2(3.81,0)
  silkscreen extent -5.71,-1.91 5.71,1.91
"Relay RC-700112-NN" [mil]
  oval 110x450 hole 400 slot 60 at 0 deg: 30(0,-274) 85(331,100) 86(-331,100)
  oval 450x110 hole 400 slot 60 at 90 deg: 87(0,431) 87a(0,100)
  silkscreen extent -530,-605 530,530
RESC1608X06N_0603 [mm] "Chip Resistor, 2-Leads, Body 1.60x0.80mm, IPC Medium Density"
  rrect50% 0.85x0.9 smd: 1(-0.775,0) 2(0.775,0)
  silkscreen extent -0.38,-0.66 0.34,0.69, body extent -0.85,-0.45 0.85,0.45, height 0.55
RESC1609X50X30NL8T20 [mm] "Chip Resistor, 2-Leads, Body 1.65x0.95mm, IPC Medium Density"
  rect 0.8x0.95 smd: 1(-0.65,0) 2(0.65,0)
  body extent -0.82,-0.48 0.82,0.48, height 0.5
"SATA Female" [mm]
  rect 0.6x2.35 smd: 1(-15.88,1.825) 2(-14.61,1.825) 3(-13.34,1.825) 4(-12.07,1.825) 5(-10.8,1.825) 6(-9.53,1.825) 7(-8.26,1.825) 8(-6.99,1.825) 9(-5.72,1.825) 10(-4.45,1.825) 11(-3.18,1.825) 12(-1.91,1.825) 13(-0.64,1.825) 14(0.63,1.825) 15(1.9,1.825) 16(7.62,1.825) 17(8.89,1.825) 18(10.16,1.825) 19(11.43,1.825) 20(12.7,1.825) 21(13.97,1.825) 22(15.24,1.825)
  rect 0x1.5 on Top Overlay: 7(6.1,0.5)
  rect 2.6x2.6 smd: 23(-21.88,0) 24(21.88,0)
SMBJ54A-13-F [mm]
  rrect50% 2.5x2.3 smd: 1(2.15,0) 2(-2.15,0)
  body extent -2.92,-1.95 2.92,1.95, height 2.5
TSSOP50P490X110-10N [mm] "TSSOP, 10-Leads, Body 3.00x3.00mm, Pitch 0.50mm, IPC Medium Density"
  oval 1.35x0.3 smd: 1(-2.225,1) 2(-2.225,0.5) 3(-2.225,0) 4(-2.225,-0.5) 5(-2.225,-1) 6(2.225,-1) 7(2.225,-0.5) 8(2.225,0) 9(2.225,0.5) 10(2.225,1)
  silkscreen extent -2.35,-1.55 1.15,1.83, body extent -2.45,-1.55 2.45,1.55, height 1.1